# Altium PCB PCB1.PcbDoc
Units mm, origin at the board's own origin, x right, y up, seen from the top; angles counter-clockwise.
Board outline 47 x 95.38 mm, 2 copper layers (Top Layer, Bottom Layer); 41 components, 59 nets, 205 pads, 57 vias.
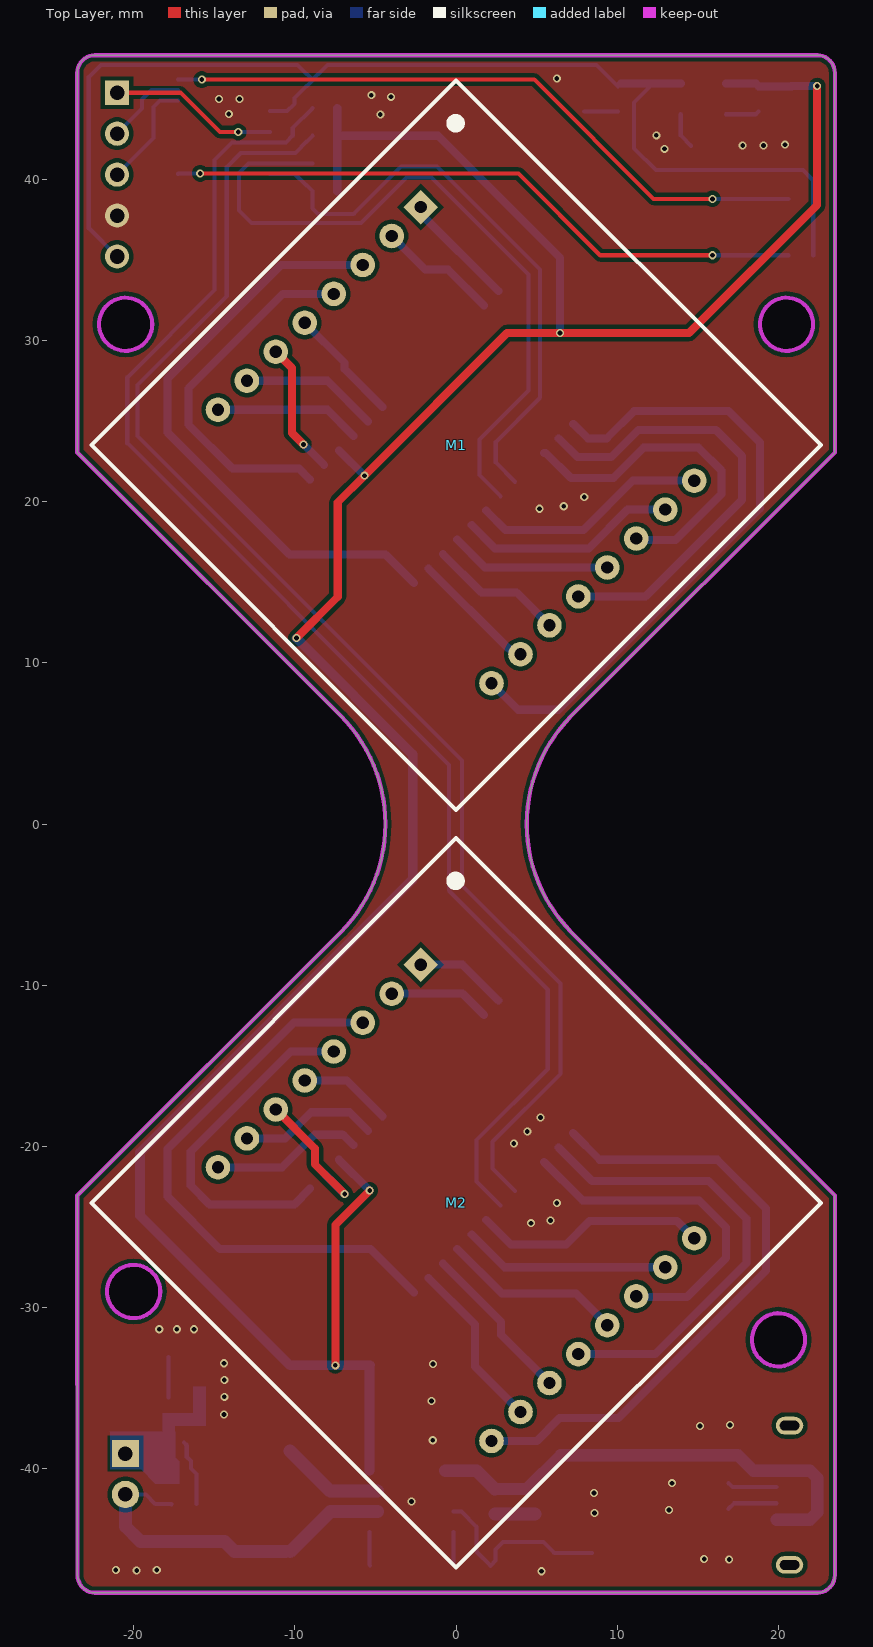
[diagram p0: Top Layer view]
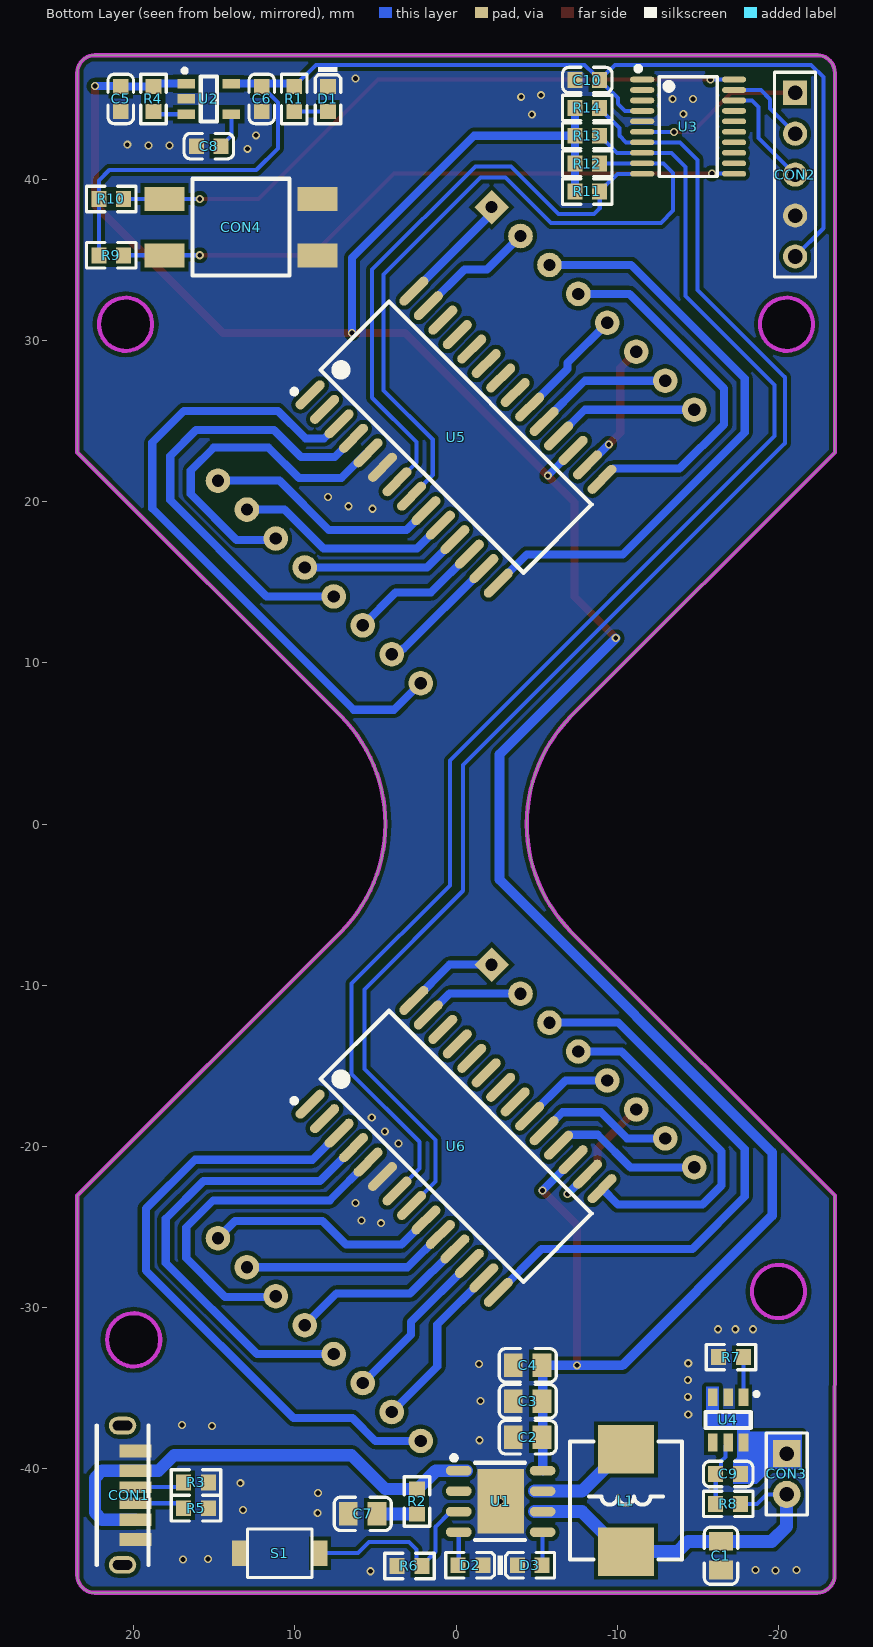
[diagram p1: Bottom Layer view, seen from below]

## Layer stack, top to bottom
Top Solder: solder mask 0.0102, Solder Resist, Dk 3.5
Top Layer: signal copper 0.0356
Dielectric 1: dielectric 0.32, FR-4, Dk 4.8
Bottom Layer: signal copper 0.0356
Bottom Solder: solder mask 0.0102, Solder Resist, Dk 3.5

## Board outline
-23.486,-46.599 ccw(c-22.397,-46.599) -22.397,-47.688 22.411,-47.688 ccw(c22.411,-46.599) 23.5,-46.599 23.5,-23.051 7.168,-6.719 cw(c13.887,0) 7.168,6.719 23.5,23.051 23.5,46.599 ccw(c22.411,46.599) 22.411,47.689 -22.411,47.688 ccw(c-22.411,46.599) -23.5,46.599 -23.5,23.051 -7.168,6.719 cw(c-13.887,0) -7.168,-6.719 -23.5,-23.051
cut-out: -22.15,31 ccw(c-20.5,31) -20.5,29.35 ccw(c-20.5,31) -18.85,31 ccw(c-20.5,31) -20.5,32.65 ccw(c-20.5,31)
cut-out: 18.85,31 ccw(c20.5,31) 20.5,29.35 ccw(c20.5,31) 22.15,31 ccw(c20.5,31) 20.5,32.65 ccw(c20.5,31)
cut-out: 18.35,-32 ccw(c20,-32) 20,-33.65 ccw(c20,-32) 21.65,-32 ccw(c20,-32) 20,-30.35 ccw(c20,-32)
cut-out: -21.65,-29 ccw(c-20,-29) -20,-30.65 ccw(c-20,-29) -18.35,-29 ccw(c-20,-29) -20,-27.35 ccw(c-20,-29)

## Design rules (kind name [scope] priority, off if disabled: settings)
Clearance [All] p1: gap=0.254 ignorepadtopadclearanceinfootprint=FALSE except(0: Arc-Hole Track-Hole SMDPad-Hole THPad-Hole Via-Hole Fill-Hole Poly-Hole Region-Hole Text-Hole)
PolygonConnect [All] p1: connectstyle=Direct reliefconductorwidth=0.254 reliefentries=4 polygonreliefangle="90 Angle" airgapwidth=0.254
RoutingVias [All] p1: holewidth=0.711 width=1.27 viastyle="Through Hole" minholewidth=0.711 minwidth=1.27 maxholewidth=0.711 maxwidth=1.27
SolderMaskExpansion [All] p1: expansion=0.102 istentingtop=FALSE
Width [All] p1: maxlimit=2 minlimit=0.254 preferedwidth=0.254
30 further rules are at their usual default settings.

## Components (designator, comment, footprint, x,y, rotation, side; value= is the part's Value field where it differs from the comment)
C1 "10uF" 0805_C -16.434,-45.39 r90 bottom
C2 "22uF" 0805_C -4.445,-38.041 r180 bottom
C3 "22uF" 0805_C -4.445,-35.81 r180 bottom
C4 "22uF" 0805_C -4.445,-33.579 r180 bottom
C5 "1uF" 0603_C 20.8,44.981 r90 bottom
C6 "1uF" 0603_C 12.057,44.981 r90 bottom
C7 "10uF" 0805_C 5.791,-42.793 r180 bottom
C8 "22nF" 0603_C 15.339,42.048 r180 bottom
C9 "0.1uF" 0603_C -16.878,-40.322 r180 bottom
C10 "0.1uF" 0603_C -8.14,46.152 r180 bottom
CON1 "USB Type-C Charge" Type-C_6P立贴 19.888,-41.638 r270 bottom
CON2 "H7-Tool SWD" hdr1x5 -21.031,45.364 r270 bottom
CON3 "HDR1x2" HDR2.54-LI-2p -20.509,-40.322 r270 bottom
CON4 "HDR1x4" RB-6635S-1T 13.341,37.025 r180 bottom
D1 "LED" 0603_LED_S1 7.95,44.981 r270 bottom
D2 "LED" 0603_LED_S1 -0.888,-45.98 r0 bottom
D3 "LED" 0603_LED_S1 -4.571,-45.98 r180 bottom
L1 "Inductor" L-SMD-0630 -10.54,-41.966 r270 bottom value=2.2uH/0630
M1 "1288AS" 1288AS 0,23.5 r225 top locked
M2 "1288AS" 1288AS 0,-23.5 r225 top locked
R1 "10K" 0603_R 10.043,44.977 r270 bottom
R2 "2R" 0603_R 2.421,-42.023 r90 bottom
R3 "5.1K" 0603_R 16.129,-40.843 r180 bottom
R4 "10K" 0603_R 18.772,44.981 r90 bottom
R5 "5.1K" 0603_R 16.129,-42.452 r180 bottom
R6 "51K" 0603_R 2.896,-46.025 r180 bottom
R7 "1K" 0603_R -17.058,-33.071 r180 bottom
R8 "100R" 0603_R -16.878,-42.175 r180 bottom
R9 "10K" 0603_R 21.387,35.275 r180 bottom
R10 "10K" 0603_R 21.387,38.775 r180 bottom
R11 "10K" 0603_R -8.14,39.237 r180 bottom
R12 "10K" 0603_R -8.14,40.966 r180 bottom
R13 "10K" 0603_R -8.14,42.694 r180 bottom
R14 "10K" 0603_R -8.14,44.423 r180 bottom
S1 "3*4 龟仔" 3x4小龟 10.939,-45.234 r180 bottom
U1 "IP5407-2D1D" SOP-8_EP_150mil -2.768,-42.023 r270 bottom
U2 "RT9193-33GB" SOT-23-5 15.339,44.981 r0 bottom
U3 "STM32G030F6P6" TSSOP-20 -14.397,43.259 r270 bottom
U4 "DW06D" SOT-23-6 -16.878,-36.968 r90 bottom
U5 "TM1640" SOP-28_300mil 0,24 r225 bottom locked
U6 "TM1640" SOP-28_300mil 0,-20 r225 bottom locked

## Footprints (in the part's own frame and the unit in brackets; to place one, negate y for a bottom-side part, rotate by r counter-clockwise, add the part's x,y. Pads: shape width x height; smd on the part's side, far side on the other; paste and mask are expansions set on the pad)
3x4小龟 [mm]
  rect 0.9x1.6 smd: 1(-2.5,0) 2(2.5,0)
  silkscreen extent -2,-1.5 2,1.5
0603_C [mm]
  rect 0.93x0.98 smd: 1(-0.77,0) 2(0.77,0)
  silkscreen extent -1.53,-0.79 1.54,0.79, body extent -0.8,-0.4 0.8,0.4, height 0.3
0603_LED_S1 [mm]
  rect 0.93x0.98 smd: A(0.77,0) K(-0.77,0)
  silkscreen extent -1.98,-0.79 1.54,0.79, body extent -0.8,-0.4 0.8,0.4, height 0.6
0603_R [mm]
  rect 0.93x0.98 smd: 1(-0.77,0) 2(0.77,0)
  silkscreen extent -1.53,-0.79 1.54,0.79, body extent -0.85,-0.4 0.85,0.4, height 0.56
0805_C [mm]
  rect 1.16x1.47 smd: 1(-0.89,0) 2(0.89,0)
  silkscreen extent -1.77,-1.04 1.77,1.04, body extent -1,-0.63 1,0.63, height 0.77
1288AS [mil] "8*8点阵"
  rect 60x60 hole 30: 1(-350,-472.44)
  round 60 hole 30: 2(-250,-472.44) 3(-150,-472.44) 4(-50,-472.44) 5(50,-472.44) 6(150,-472.44) 7(250,-472.44) 8(350,-472.44) 9(350,472.44) 10(250,472.44) 11(150,472.44) 12(50,472.44) 13(-50,472.44) 14(-150,472.44) 15(-250,472.44) 16(-350,472.44)
  silkscreen extent -630,-630 630,630
hdr1x5 [mm] "Connector; Header; 5 Position"
  rect 1.5x1.5 hole 0.9: 1(0,0)
  round 1.5 hole 0.9: 2(2.54,0) 3(5.08,0) 4(7.62,0) 5(10.16,0)
  silkscreen extent -1.27,-1.27 11.43,1.27
HDR2.54-LI-2p [mm] "排针，2脚"
  rect 1.7x1.7 hole 0.9: 1(-1.27,0)
  round 1.7 hole 0.9: 2(1.27,0)
  silkscreen extent -2.54,-1.27 2.54,1.27, body extent -2.54,-1.27 2.54,1.27, height 8.5
L-SMD-0630 [mm] "一体化成型电感"
  rect 3x3.5 smd: 1(-3.175,0) 2(3.175,0)
  silkscreen extent -3.66,-3.48 3.66,3.48, body extent -3.47,-3.3 3.48,3.3, height 3.05
RB-6635S-1T [mm]
  rect 2.5x1.5 smd: 1(4.75,1.75) 2(4.75,-1.75) 3(-4.75,-1.75) 4(-4.75,1.75)
  silkscreen extent -3,-3 3,3
SOP-8_EP_150mil [mm]
  rect 4x2.9 smd: 0(0,0)
  oval 0.6x1.6 smd: 1(-1.905,-2.6) 2(-0.635,-2.6) 3(0.635,-2.6) 4(1.905,-2.6) 5(1.905,2.6) 6(0.635,2.6) 7(-0.635,2.6) 8(-1.905,2.6)
  silkscreen extent -2.85,-3.05 2.4,1.5
SOP-28_300mil [mm]
  oval 0.6x2.3 smd: 1(-8.255,-4.55) 2(-6.985,-4.55) 3(-5.715,-4.55) 4(-4.445,-4.55) 5(-3.175,-4.55) 6(-1.905,-4.55) 7(-0.635,-4.55) 8(0.635,-4.55) 9(1.905,-4.55) 10(3.175,-4.55) 11(4.445,-4.55) 12(5.715,-4.55) 13(6.985,-4.55) 14(8.255,-4.55) 15(8.255,4.55) 16(6.985,4.55) 17(5.715,4.55) 18(4.445,4.55) 19(3.175,4.55) 20(1.905,4.55) 21(0.635,4.55) 22(-0.635,4.55) 23(-1.905,4.55) 24(-3.175,4.55) 25(-4.445,4.55) 26(-5.715,4.55) 27(-6.985,4.55) 28(-8.255,4.55)
  silkscreen extent -9.25,-5.25 8.9,3
SOT-23-5 [mm]
  rect 1.1x0.6 smd: 1(1.4,-0.95) 2(1.4,0) 3(1.4,0.95) 4(-1.4,0.95) 5(-1.4,-0.95)
  silkscreen extent -0.5,-1.87 1.63,1.4
SOT-23-6 [mm]
  rect 1.1x0.6 smd: 1(1.4,-0.95) 2(1.4,0) 3(1.4,0.95) 4(-1.4,0.95) 5(-1.4,0) 6(-1.4,-0.95)
  silkscreen extent -0.5,-1.87 1.72,1.4
TSSOP-20 [mm]
  oval 0.35x1.5 smd: 1(-2.925,-2.85) 2(-2.275,-2.85) 3(-1.625,-2.85) 4(-0.975,-2.85) 5(-0.325,-2.85) 6(0.325,-2.85) 7(0.975,-2.85) 8(1.625,-2.85) 9(2.275,-2.85) 10(2.925,-2.85) 11(2.925,2.85) 12(2.275,2.85) 13(1.625,2.85) 14(0.975,2.85) 15(0.325,2.85) 16(-0.325,2.85) 17(-0.975,2.85) 18(-1.625,2.85) 19(-2.275,2.85) 20(-2.925,2.85)
  silkscreen extent -3.75,-3.25 3.1,1.8
Type-C_6P立贴 [mm]
  oval 1.1x1.7 hole 0.6 slot 1.2 at 90 deg: 0(-4.32,-0.8) 0(4.32,-0.8)
  rect 0.7x2 smd: A5(-0.5,0) B5(0.5,0)
  rect 0.76x2 smd: A9(1.52,0) B9(-1.52,0)
  rect 0.8x2 smd: A12(2.75,0) B12(-2.75,0)
  silkscreen extent -4.32,-2.4 4.32,0.8

## Part data
C1 C2 C3 C4 C5 C6 C7 C8 C9 C10: library part "0603 100nF (104) 10% 50V", "贴片电容", Package=0603, SuppliersPartNumber=C14663, ComponentLink1Description=供应商链接, ComponentLink1URL=http://www.szlcsc.com/product/details_15331.html, Supplier=LC
D1 D2 D3: library part Diode, "二极管", Package=SMA(DO-214AC), SuppliersPartNumber=C95872, ComponentLink1Description=供应商链接, ComponentLink1URL=http://www.szlcsc.com/product/details_2841.html, Notepad="1N4007 4007 编号C2464 已经停售, 使用新物料编号C95872", Supplier=LC
R1 R2 R3 R4 R5 R6 R7 R8 R9 R10 R11 R12 R13 R14: library part RES, "Resistor"
S1: library part SW-PB, "Switch", LatestRevisionDate=17-Jul-2002, LatestRevisionNote="Re-released for DXP Platform.", PackageDescription="Switch; 2 Leads", PackageReference=SPST-2, Published=24-Mar-1999, Publisher="Altium Limited"
U2: "SOT23-5 300MA 3.3V LDO稳压器"
U4: "二合一锂电池保护 IC"
U5 U6: "具有显示模式(8 段×16 位),两线串行接口(SCLK，DIN)的LED驱动IC"
L1: Code_IEC=1005, Code_JEITA=0402, LatestRevisionDate=29-May-2009, LatestRevisionNote="IPC-7351 Footprint Added.", PackageDescription="Chip Inductor", PackageReference=0402-A, Published=8-Jun-2000, Publisher="Altium Limited"

## Via types
v1: diameter 0.5, hole 0.3, Top Layer to Bottom Layer, tented both sides, 57 vias

## Nets (pads, with @x,y where several pads share a name; then routed paths per layer and width w, separated by ;. In a path a pad name is that pad's centre, name@x,y a point inside that pad or via, vN(x,y) a via of type N, cw(c..) or ccw(c..) an arc to the next point about the centre after c; other vN are vias at no path point)
1640A_CLK: R12.2 U3.9 U5.8 | length 44.6
  Bottom Layer w0.254: R12.2 -8.928,40.984 U3.9 -12.864,40.984 -13.462,40.386 -13.462,38.049 -12.7,37.287 -5.893,37.287 -3.073,40.107 -1.524,40.107 4.496,34.087 4.496,26.899 1.448,23.851 1.448,21.654 U5.8
1640A_DIN: R11.2 U3.10 U5.7 | length 37.1
  Bottom Layer w0.254: U3.10 -10.007,40.334 -9.273,39.6 -9.248,39.6 -8.91,39.262 R11.2 -8.91,38.196 -8.56,37.846 -6.35,37.846 -3.404,40.792 -1.195,40.792 5.207,34.39 5.207,26.443 2.464,23.7 2.464,22.434 U5.7
1640B_CLK: R14.2 U3.7 U6.8 | length 88.1
  Bottom Layer w0.254: R14.2 -8.91,44.398 -10.135,43.173 -10.135,42.697 -10.548,42.284 U3.7 -13.901,42.284 -14.986,41.199 -14.986,33.122 -20.396,27.711 -20.396,23.622 -0.432,3.658 -0.432,-4.14 5.686,-10.258 5.686,-15.193 1.27,-19.609 1.27,-22.168 U6.8
1640B_DIN: R13.2 U3.8 U6.7 | length 85.2
  Bottom Layer w0.254: R13.2 -8.91,42.669 -9.248,42.331 -9.273,42.331 -9.971,41.634 U3.8 -13.357,41.634 -14.224,40.767 -14.224,32.766 -19.761,27.229 -19.761,24.079 0.376,3.942 0.376,-3.805 6.475,-9.904 6.475,-15.496 2.261,-19.71 2.261,-21.363 U6.7
+3.3V: C6.2 C10.2 CON2.5 R1.1 R9.1 R10.1 U2.5 U3.4 | length 75
  Bottom Layer w0.254: CON2.5 -22.784,36.957 -22.784,46.33 -22.022,47.092 -9.85,47.092 -9.273,46.515 -9.248,46.515 C10.2@-8.91,46.177 ; U3.4 -10.478,44.234 -10.033,44.679 -10.033,45.029 -9.273,45.789 -9.248,45.789 -8.91,46.127 C10.2 C10.2@-8.91,46.177 ; R1.1@10.227,45.931 R1.1 8.699,47.092 -7.97,47.092 -8.547,46.515 -8.572,46.515 C10.2@-8.91,46.177 ; C6.2@12.032,45.931 12.032,45.751 11.049,44.767 11.049,41.91 12.395,40.564 21.514,40.564 22.157,39.921 R10.1 ; R9.1 R10.1@22.157,38.8
  Bottom Layer w0.5: R1.1@10.227,45.931 12.032,45.931 U2.5
+5V: C2.2 C3.2 C4.2 C5.2 R4.2 R11.1 R12.1 R13.1 R14.1 U1.8 U2.1 U5.17 U6.17 | length 173.9
  Top Layer w0.5: v1(-9.906,11.532) -7.341,14.097 -7.341,19.956 v1(-5.69,21.607) 3.158,30.455 v1(6.452,30.455) 14.453,30.455 22.403,38.405 v1(22.403,45.771) ; v1(-7.493,-33.579) -7.493,-24.867 v1(-5.359,-22.733)
  Bottom Layer w0.254: R4.2@18.592,45.931 R4.2 ; C5.2 C5.2@20.821,45.771
  Bottom Layer w0.5: R11.1 R12.1 R13.1 ; R14.1 R13.1 ; U6.17 -7.258,-20.834 v1(-5.359,-22.733) ; U5.17 v1(-5.69,21.607) ; v1(6.452,30.455) 6.452,35.128 -1.114,42.694 R13.1 ; U2.1 R4.2@18.592,45.931 ; R4.2 C5.2 ; C5.2@20.821,45.771 v1(22.403,45.771)
  Bottom Layer w0.6: v1(-9.906,11.532) -2.692,4.318 -2.692,-3.454 -19.609,-20.371 -19.609,-24.282 -10.312,-33.579 v1(-7.493,-33.579) C4.2@-5.368,-33.579 ; U1.8 C4.2@-5.368,-33.579 ; C4.2 C4.2@-5.368,-33.579
BAT+: C1.2 CON3.2 L1.2 R8.2 U1.6 | length 22.2
  Bottom Layer w0.254: CON3.2 -19.248,-41.592 -18.664,-42.175 R8.2 R8.2@-17.648,-42.2
  Bottom Layer w0.8: CON3.2 -20.509,-43.575 -19.584,-44.5 C1.2 -14.377,-44.5 -13.736,-45.141 L1.2 ; L1.2@-10.29,-45.141 -7.808,-42.658 U1.6 U1.6@-4.877,-42.658
BAT-: C9.2 CON3.1 U4.3 U4.6
GND: C1.1 C2.1 C3.1 C4.1 C5.1 C6.1 C7.1 C8.1 C10.1 CON1.A12 CON1.B12 CON2.4 CON4.1 CON4.2 D1.K D2.K D3.K R3.2 R5.2 R6.1 R7.1 S1.1 U1.0 U2.2 U3.5 U4.2 U5.6 U6.6
  other v1: 5.309,-46.355 -19.812,-46.304 -21.107,-46.279 -18.567,-46.279 16.942,-45.618 15.392,-45.593 8.585,-42.748 13.208,-42.545 -2.768,-42.023 8.56,-41.504 13.386,-40.894 -1.448,-38.227 15.138,-37.338 16.993,-37.287 -14.402,-36.627 -1.524,-35.789 -14.376,-35.535 -14.376,-34.493 -1.422,-33.503 -14.402,-33.452 -18.415,-31.344 -17.323,-31.344 -16.256,-31.344 4.648,-24.765 5.867,-24.587 6.248,-23.52 3.581,-19.812 4.42,-19.075 5.232,-18.212 5.182,19.558 6.68,19.71 7.95,20.295 12.929,41.885 17.78,42.088 19.075,42.088 20.396,42.139 12.421,42.723 -4.699,44.018 -14.097,44.044 -14.707,44.983 -13.437,44.983 -4.039,45.11 -5.258,45.212 6.248,46.253
NetC7_2: C7.2 R2.1 | length 2.5
  Bottom Layer w0.8: R2.1 C7.2
NetC8_2: C8.2 U2.4 | length 2.2
  Bottom Layer w0.254: U2.4 13.939,42.703 14.569,42.073 C8.2
NetC9_1: C9.1 R8.1 U4.5 | length 4.1
  Bottom Layer w0.254: U4.5 -16.707,-38.539 -16.707,-39.256 -16.446,-39.517 -16.446,-39.984 C9.1 R8.1
NetCON1_A5: CON1.A5 R3.1 | length 3.1
  Bottom Layer w0.254: R3.1@16.899,-40.894 17.143,-41.138 CON1.A5
NetCON1_B5: CON1.B5 R5.1 | length 3.2
  Bottom Layer w0.254: R5.1@16.899,-42.503 16.899,-42.478 17.239,-42.138 CON1.B5
NetD1_A: D1.A R1.2 | length 2.1
  Bottom Layer w0.254: D1.A 7.954,44.207 R1.2
NetD2_A: D2.A U1.4 | length 2.1
  Bottom Layer w0.254: U1.4 -0.168,-45.93 D2.A
NetD3_A: D3.A U1.5 | length 2.1
  Bottom Layer w0.254: U1.5 -5.368,-45.953 D3.A
NetL1_1: L1.1 U1.7 | length 6.4
  Bottom Layer w0.8: L1.1@-10.29,-38.906 -7.808,-41.388 U1.7 U1.7@-4.877,-41.388
NetM1_1: M1.1 U5.28 | length 7.2
  Bottom Layer w0.5: M1.1 -2.199,37.873 U5.28
NetM1_2: M1.2 U5.27 | length 7.5
  Bottom Layer w0.5: M1.2 -1.911,34.392 -0.513,34.392 U5.27
NetM1_3: M1.3 U5.14 | length 37.5
  Bottom Layer w0.5: M1.3 -10.863,34.679 -17.907,27.635 -17.907,24.282 -10.338,16.713 -4.388,16.713 U5.14
NetM1_4: M1.4 U5.15 | length 22.7
  Bottom Layer w0.5: U5.15 -9.082,21.38 -9.749,22.047 -13.868,22.047 -16.612,24.79 -16.612,27.026 -10.754,32.883 M1.4
NetM1_5: M1.5 U5.20 | length 7.2
  Bottom Layer w0.5: M1.5 -6.909,28.613 -6.909,28.215 U5.20
NetM1_6: M1.6 U5.16 | length 8.3
  Top Layer w0.5: M1.6 -10.185,28.297 -10.185,24.257 v1(-9.474,23.546)
  Bottom Layer w0.254: v1(-9.474,23.546) v1@-9.449,23.546 ; U5.16@-8.182,22.278 U5.16
  Bottom Layer w0.5: v1@-9.449,23.546 U5.16@-8.182,22.278
NetM1_7: M1.7 U5.19 | length 8.6
  Bottom Layer w0.5: M1.7 -7.985,27.495 U5.19
NetM1_8: M1.8 U5.18 | length 9.1
  Bottom Layer w0.5: M1.8 -7.985,25.699 U5.18
NetM1_9: M1.9 U5.3 | length 40.1
  Bottom Layer w0.5: M1.9 3.841,7.087 6.35,7.087 18.847,19.583 18.847,23.673 16.891,25.629 11.049,25.629 9.347,23.927 8.182,23.927 7.286,24.824 U5.3
NetM1_10: M1.10 U5.13 | length 7.9
  Bottom Layer w0.5: U5.13 3.242,10.88 3.296,10.88 3.651,10.525 M1.10
NetM1_11: M1.11 U5.12 | length 8.4
  Bottom Layer w0.5: U5.12 1.567,14.351 3.761,14.351 M1.11
NetM1_12: M1.12 U5.4 | length 28.6
  Bottom Layer w0.5: U5.4 7.528,22.758 9.627,22.758 11.303,24.435 16.129,24.435 17.729,22.835 17.729,20.091 11.754,14.117 M1.12
NetM1_13: M1.13 U5.11 | length 10
  Bottom Layer w0.5: U5.11 1.801,15.913 M1.13
NetM1_14: M1.14 U5.5 | length 21
  Bottom Layer w0.5: U5.5 5.556,23.028 7.121,21.463 9.754,21.463 11.633,23.343 15.037,23.343 16.459,21.92 16.459,20.472 13.614,17.628 11.261,17.628 M1.14
NetM1_15: M1.15 U5.10 | length 13.6
  Bottom Layer w0.5: U5.10 2.416,17.094 8.23,17.094 10.64,19.505 M1.15
NetM1_16: M1.16 U5.9 | length 14.7
  Bottom Layer w0.5: U5.9 3.069,18.237 7.899,18.237 10.963,21.301 M1.16
NetM2_1: M2.1 U6.28 | length 5.7
  Bottom Layer w0.5: M2.1 0.403,-8.729 U6.28
NetM2_2: M2.2 U6.27 | length 6.3
  Bottom Layer w0.5: M2.2 0.403,-10.525 U6.27
NetM2_3: M2.3 U6.14 | length 36.1
  Bottom Layer w0.5: M2.3 -10.06,-12.321 -17.907,-20.168 -17.907,-23.114 -14.656,-26.365 -5.309,-26.365 U6.14
NetM2_4: M2.4 U6.15 | length 21.8
  Bottom Layer w0.5: U6.15 -10.031,-23.597 -15.291,-23.597 -16.459,-22.428 -16.459,-20.32 -10.256,-14.117 M2.4
NetM2_5: M2.5 U6.20 | length 5.7
  Bottom Layer w0.5: M2.5 -6.781,-15.913 U6.20
NetM2_6: M2.6 U6.16 | length 8.8
  Top Layer w0.5: M2.6 -8.763,-20.125 -8.763,-21.107 v1(-6.909,-22.962)
  Bottom Layer w0.254: U6.16 U6.16@-8.153,-21.722 ; v1@-6.913,-22.962 v1(-6.909,-22.962)
  Bottom Layer w0.5: U6.16@-8.153,-21.722 v1@-6.913,-22.962
NetM2_7: M2.7 U6.19 | length 8.7
  Bottom Layer w0.5: M2.7 -10.615,-19.505 -8.992,-17.882 -6.609,-17.882 U6.19
NetM2_8: M2.8 U6.18 | length 9.5
  Bottom Layer w0.5: M2.8 -10.811,-21.301 -8.788,-19.279 -7.078,-19.279 -7.051,-19.306 -6.981,-19.306 U6.18
NetM2_9: M2.9 U6.3 | length 39.2
  Bottom Layer w0.5: M2.9 5.01,-38.271 6.426,-36.855 10.084,-36.855 19.228,-27.711 19.228,-23.851 16.205,-20.828 8.91,-20.828 U6.3
NetM2_10: M2.10 U6.13 | length 10.7
  Bottom Layer w0.5: U6.13 1.168,-31.047 1.168,-33.649 M2.10
NetM2_11: M2.11 U6.12 | length 10.2
  Bottom Layer w0.5: U6.12 2.794,-30.876 2.794,-31.682 M2.11
NetM2_12: M2.12 U6.4 | length 29
  Bottom Layer w0.5: U6.4 8.435,-22.149 15.672,-22.149 18.009,-24.486 18.009,-27.229 12.354,-32.883 M2.12
NetM2_13: M2.13 U6.11 | length 11.3
  Bottom Layer w0.5: U6.11 2.848,-29.134 7.43,-29.134 M2.13
NetM2_14: M2.14 U6.5 | length 21.4
  Bottom Layer w0.5: U6.5 7.833,-23.343 15.062,-23.343 16.739,-25.019 16.739,-26.924 14.326,-29.337 11.225,-29.337 M2.14
NetM2_15: M2.15 U6.10 | length 12.8
  Bottom Layer w0.5: U6.10 3.005,-27.495 M2.15
NetM2_16: M2.16 U6.9 | length 14.6
  Bottom Layer w0.5: U6.9 3.392,-26.086 6.833,-26.086 8.28,-24.638 13.71,-24.638 M2.16
NetR4_1: R4.1 U2.3 | length 2.1
  Bottom Layer w0.254: U2.3 18.592,44.031 R4.1
NetR6_2: R6.2 S1.2 U1.3 | length 12.2
  Bottom Layer w0.254: U1.3 0.332,-42.658 1.27,-43.597 1.27,-45.144 2.126,-46 R6.2 2.457,-45.693 2.457,-45.015 2.921,-44.552 5.41,-44.552 6.093,-45.234 S1.2
NetR7_2: R7.2 U4.1 | length 2.5
  Bottom Layer w0.254: U4.1 R7.2
NRST: CON2.1 U3.6 | length 10.5
  Top Layer w0.254: CON2.1 -17.094,45.364 -14.656,42.926 v1(-13.513,42.926)
  Bottom Layer w0.254: v1(-13.513,42.926) -13.505,42.934 U3.6
PA4: CON4.3 R9.2 U3.11 | length 40
  Top Layer w0.254: v1(-15.875,40.361) 3.861,40.361 8.941,35.281 v1(15.9,35.281)
  Bottom Layer w0.254: U3.11 -17.234,40.347 -15.888,40.347 v1(-15.875,40.361) ; v1(15.9,35.281) 20.611,35.281 R9.2
PB5: CON4.4 R10.2 U3.20 | length 40.9
  Top Layer w0.254: v1(-15.773,46.177) 4.851,46.177 12.248,38.781 v1(15.9,38.781)
  Bottom Layer w0.254: U3.20 -17.244,46.18 -15.777,46.18 v1(-15.773,46.177) ; v1(15.9,38.781) R10.2@20.611,38.781
SWCLK: CON2.2 U3.19 | length 5.2
  Bottom Layer w0.254: CON2.2 -19.482,44.374 -19.482,44.958 -18.906,45.534 U3.19
SWDIO: CON2.3 U3.18 | length 6.8
  Bottom Layer w0.254: CON2.3 -18.771,42.545 -18.771,44.475 -18.362,44.884 U3.18
VBUS: CON1.A9 CON1.B9 R2.2 U1.1 | length 29.8
  Bottom Layer w0.254: R2.2@2.396,-41.253 R2.2
  Bottom Layer w0.76: R2.2 4.39,-41.253 6.488,-39.155 17.489,-39.155 18.452,-40.118 CON1.B9 21.958,-40.118 22.403,-40.564 22.403,-42.713 21.958,-43.158 CON1.A9
  Bottom Layer w0.8: U1.1@-0.66,-40.118 U1.1 1.261,-40.118 R2.2@2.396,-41.253
pads on no net: CON1.0 U1.2 U3.1 U3.2 U3.3 U3.12 U3.13 U3.14 U3.15 U3.16 U3.17 U4.4 U5.1 U5.2 U5.21 U5.22 U5.23 U5.24 U5.25 U5.26 U6.1 U6.2 U6.21 U6.22 U6.23 U6.24 U6.25 U6.26

## Polygon pours and split planes (outlines as drawn)
GND on Bottom Layer "GND_L02_P000" (solid, remove dead copper, pour order 0): 31.547,54.254 29.235,51.943 -28.829,51.943 -28.829,-46.406 -22.733,-52.502 -21.311,-51.079 27.076,-51.079
GND on Top Layer "GND_L01_P001" (solid, remove dead copper, pour order 1): 31.674,53.238 -23.292,53.238 -28.702,47.828 -28.194,47.32 -28.194,-48.844 25.425,-48.844 28.55,-45.72

## Keep-outs
Keep-Out Layer:
  circle w0.254: c20.5,31 r1.65
  circle w0.254: c-20.5,31 r1.65
  circle w0.254: c-20,-29 r1.65
  circle w0.254: c20,-32 r1.65
  lines w0.254: -23.5,-23.051 -23.486,-46.599 ccw(c-22.397,-46.599) -22.397,-47.688 22.411,-47.688 ccw(c22.411,-46.599) 23.5,-46.599 23.5,-23.051 7.168,-6.719 cw(c13.887,0) 7.168,6.719 23.5,23.051 23.5,46.599 ccw(c22.411,46.599) 22.411,47.689 -22.411,47.688 ccw(c-22.411,46.599) -23.5,46.599 -23.5,23.051 -7.168,6.719 cw(c-13.887,0) -7.168,-6.719 -23.5,-23.051

## Other copper
Bottom Layer:
  region net BAT-: -18.222,-37.284 -18.222,-37.792 -17.435,-37.792 -17.435,-37.284
  region net BAT-: -18.222,-36.547 -18.222,-37.334 -16.19,-37.334 -16.19,-36.547
  region net BAT-: -16.317,-34.896 -16.317,-37.334 -15.504,-37.334 -15.504,-34.896
  region net BAT-: -17.181,-40.916 -17.181,-39.544 -17.435,-39.29 -17.435,-37.715 -21.473,-37.715 -21.448,-37.741 -21.448,-40.027 -19.543,-40.027 -18.654,-40.916 -18.552,-40.916